# EAGLE board ATTiny Fuse Reset with 12V Charge Pump (EAGLE 6.0)
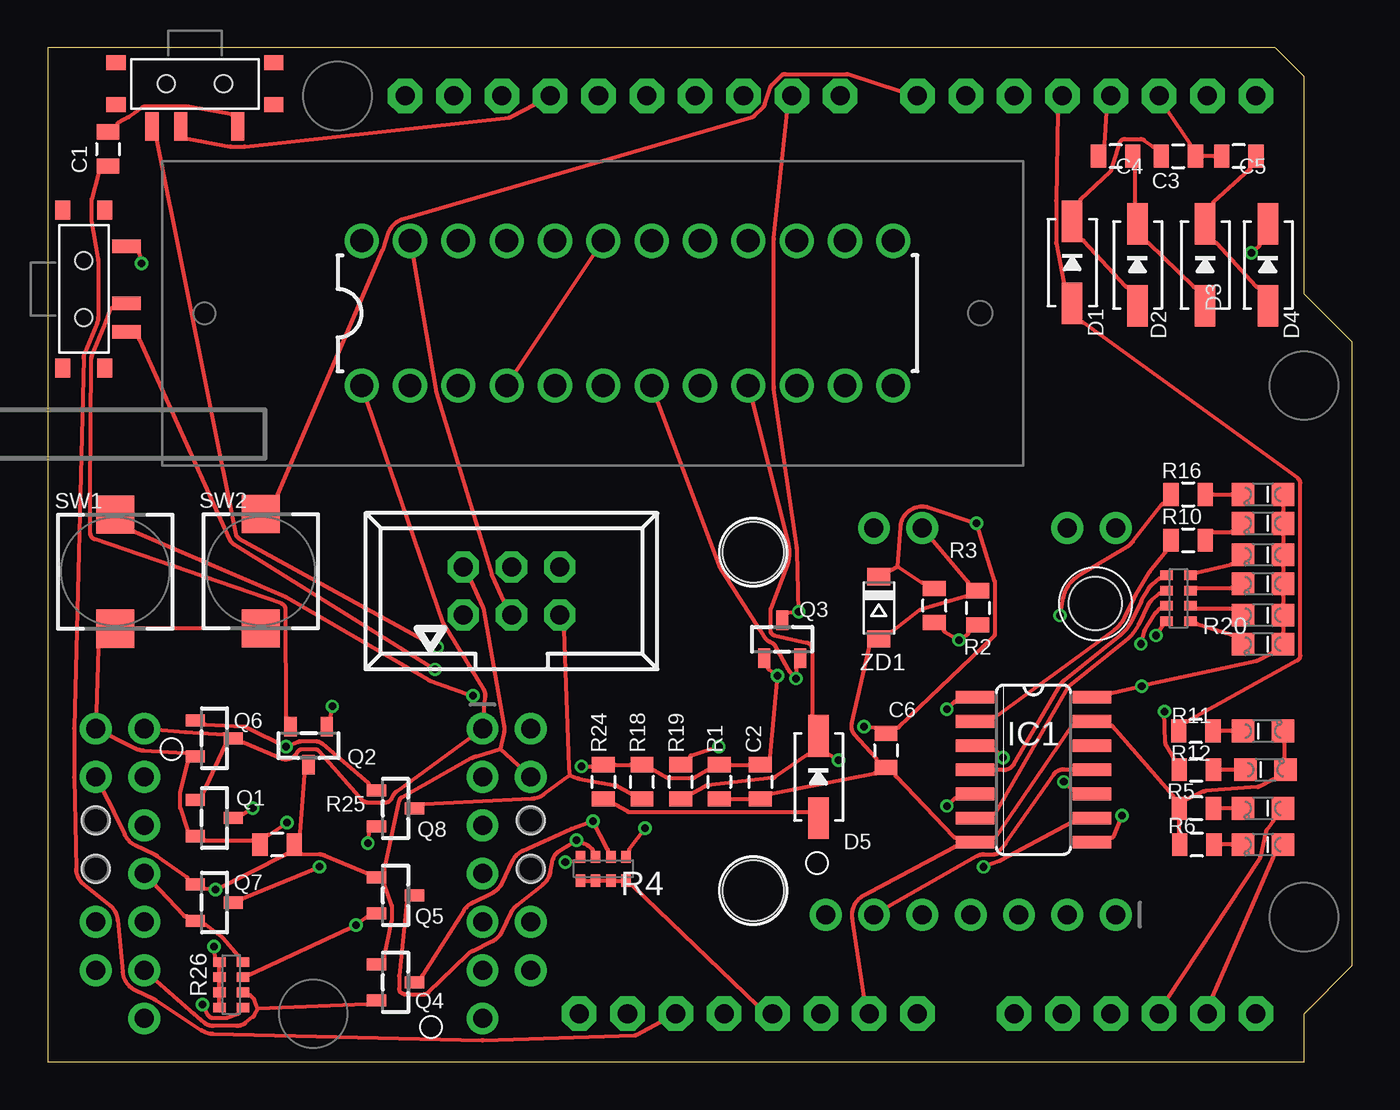
[diagram p0: board, top side]
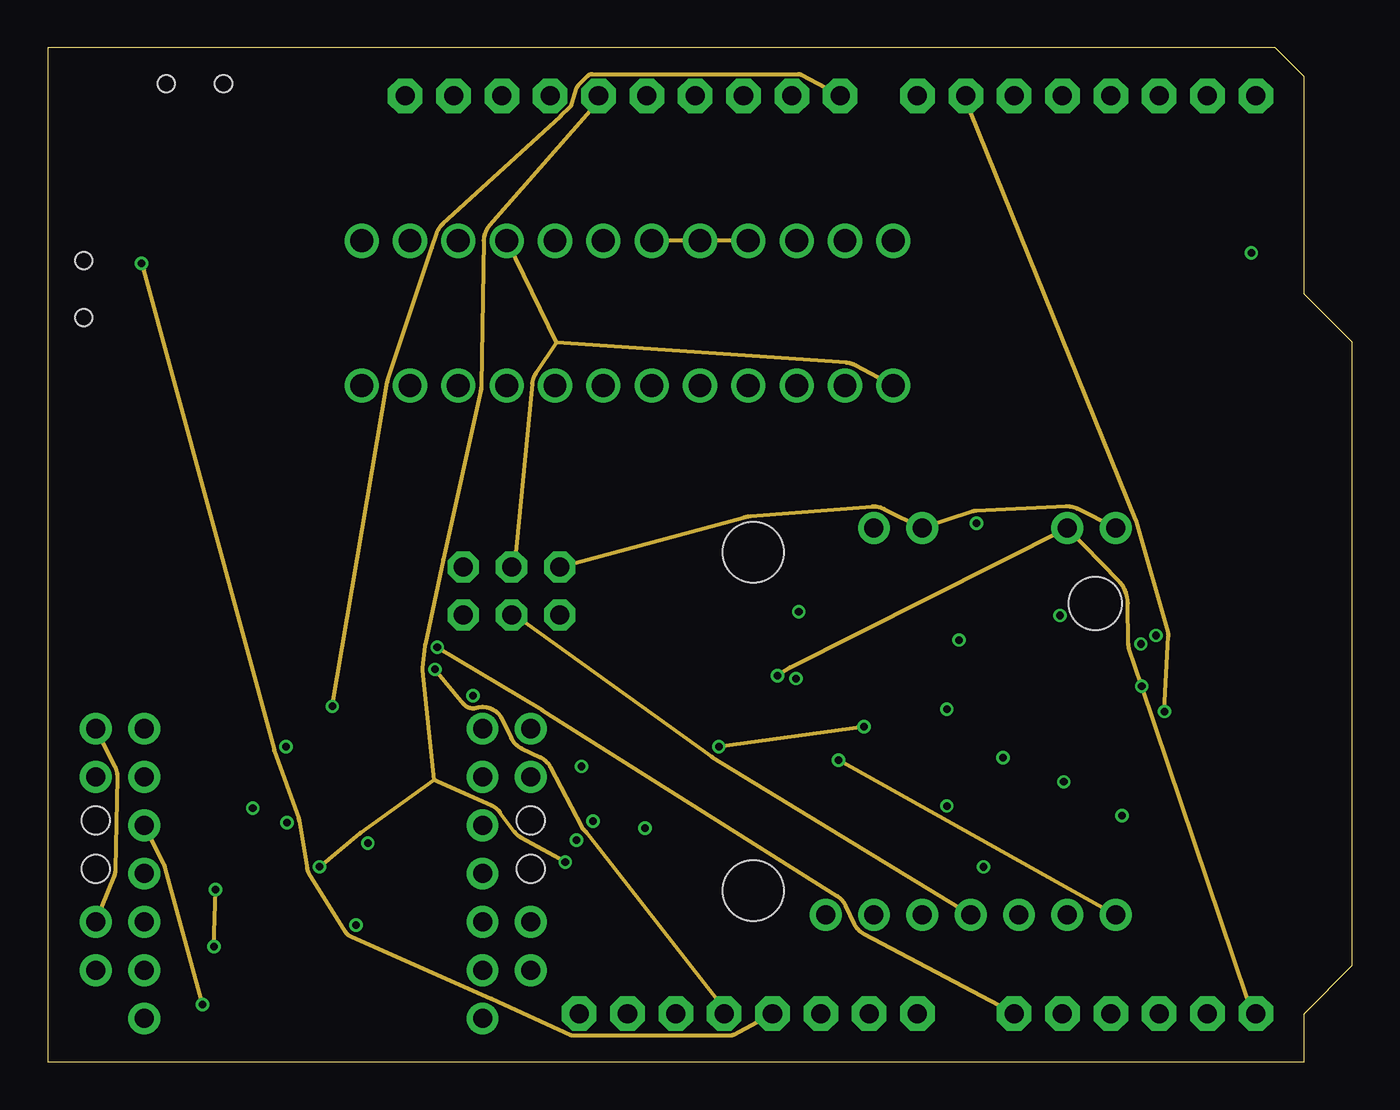
[diagram p1: board, inner layer top-1]
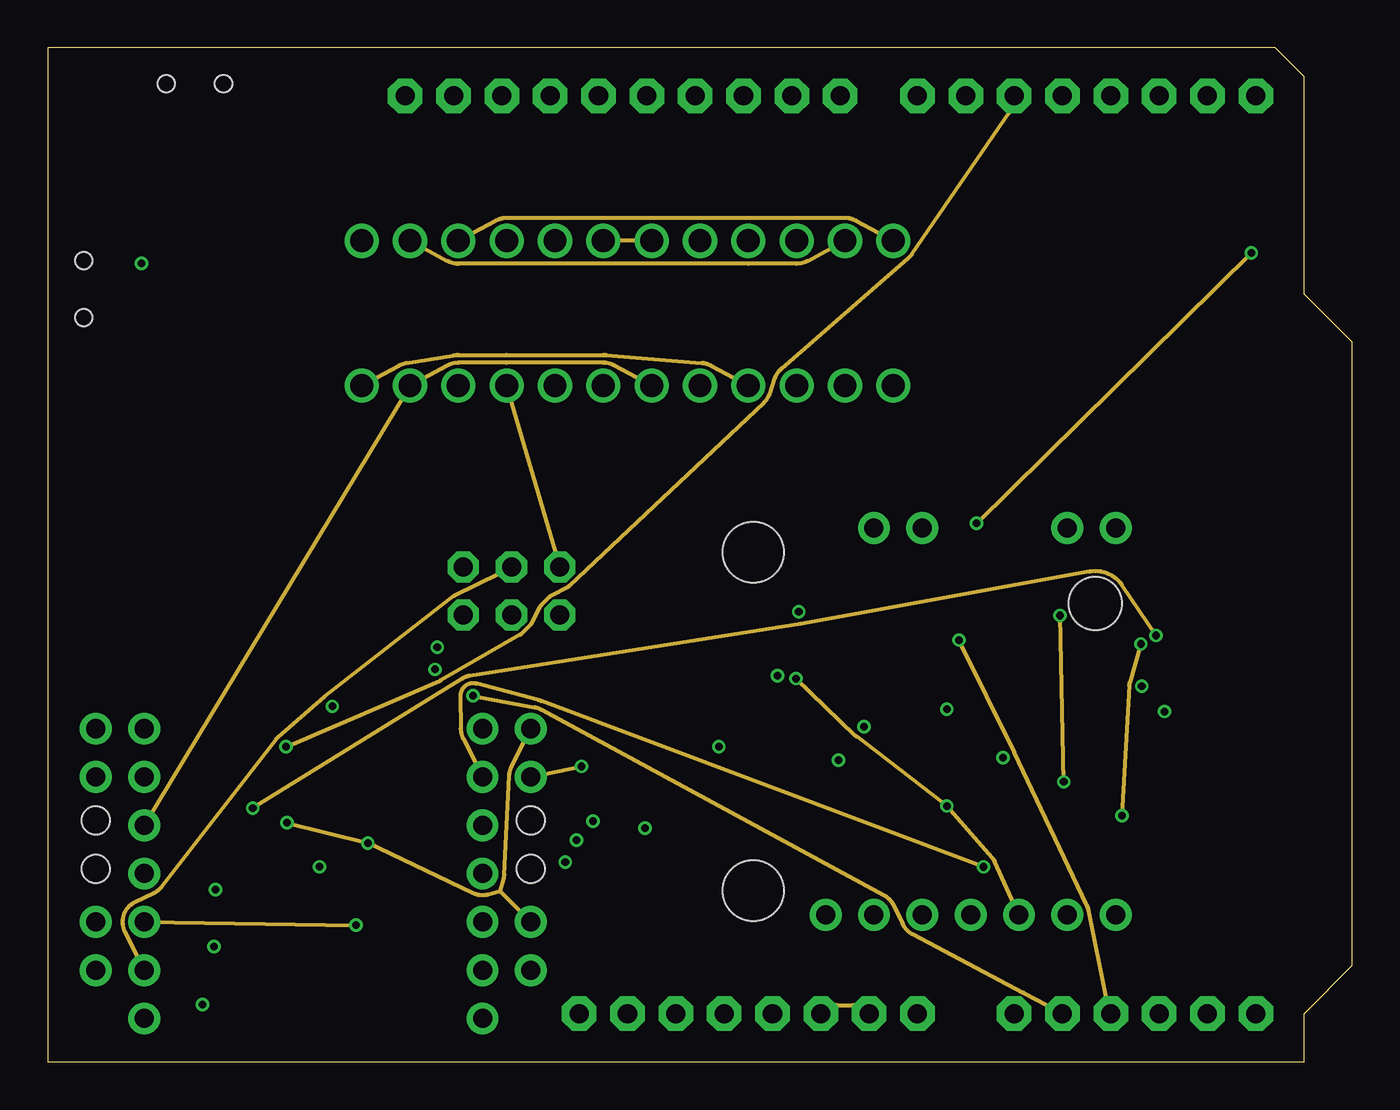
[diagram p2: board, inner layer bot-1]
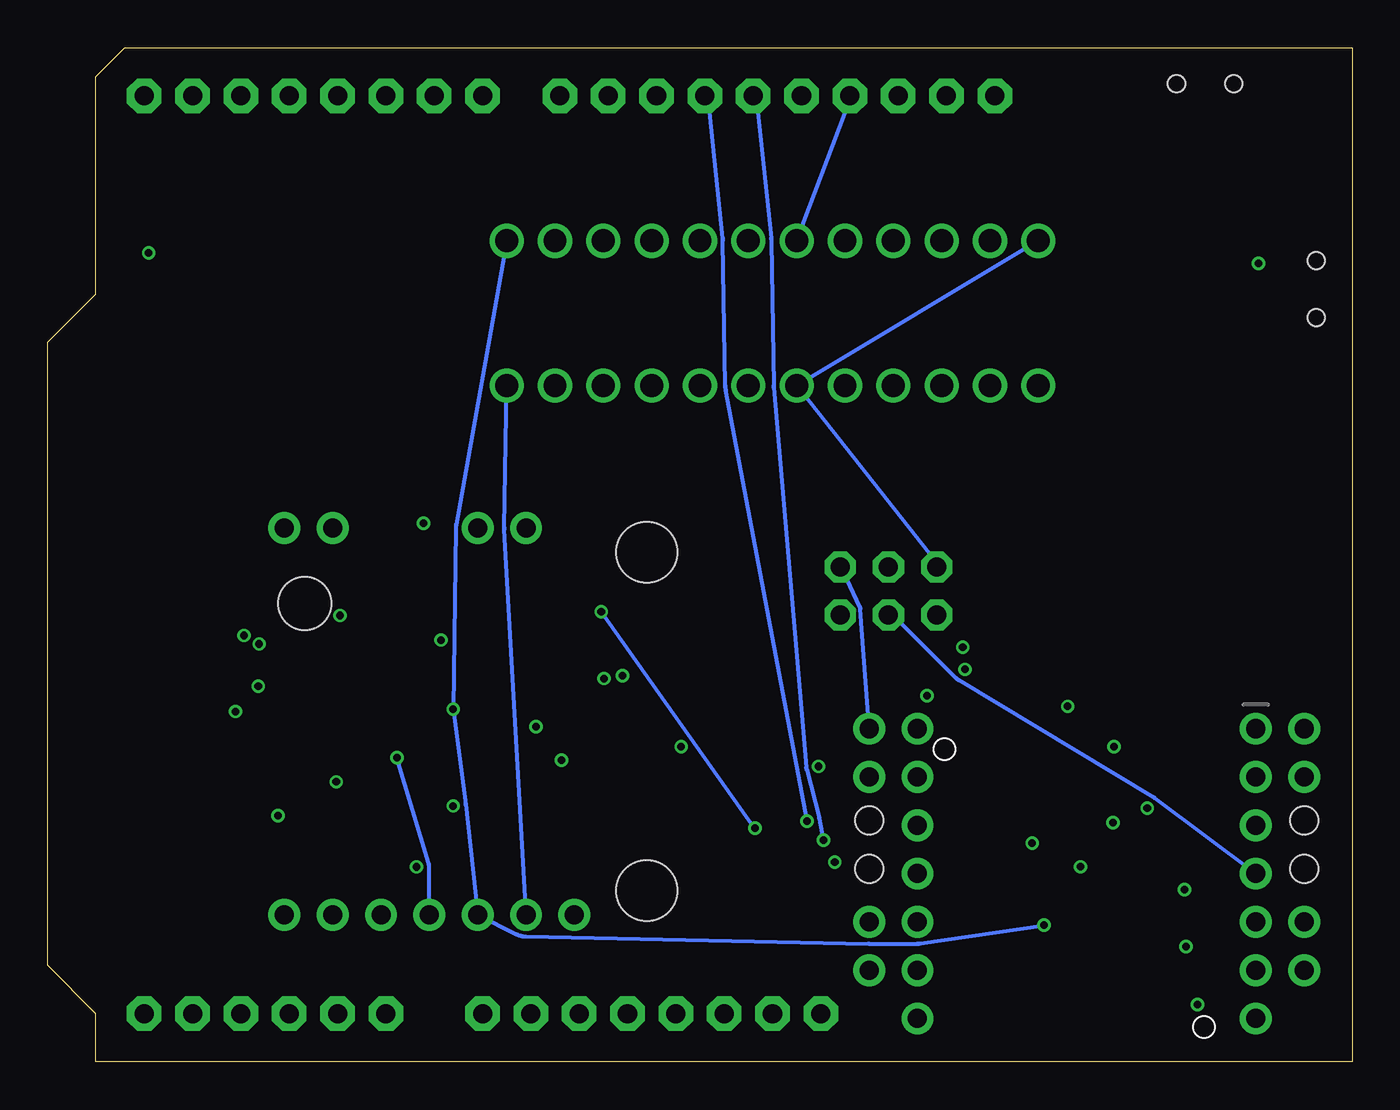
[diagram p3: board, bottom side, seen from below]

Size 68.58 x 53.34 mm. Coordinates in mm from the lower left corner, seen from the top.
Outline: 0,53.34 0,0 66.04,0 66.04,2.54 68.58,5.08 68.58,37.85 66.04,40.39 66.04,51.82 64.52,53.34 0,53.34
Copper layers 1+2+3+16: TOP 0.035mm / dielectric 0.15mm / top-1 0.0035mm / dielectric 0.2mm / bot-1 0.0035mm / dielectric 0.15mm / BOTTOM 0.035mm
Design rules: minimum track width 0.2032mm, track to track 0.2032mm, copper to edge 0.254mm, minimum pad ring 0.1mm, minimum via ring 0.1mm
Net classes: 0 default: width 0.203 mm, clearance 0.205 mm

## Footprints (pad centres in the part's own frame; a part is rotated, then mirrored left to right if it is on the bottom)
BREAKOUT_TAMI_NOHOLES = drill 1 pad 1.676: 1.PB5 -10.16,-8.89; 2.PB4 -10.16,-6.35; 3.PB3 -10.16,-3.81; 4.PB2 -10.16,-1.27; 5.PB1 -10.16,1.27; 6.PB0 -10.16,3.81; 7.GND -10.16,6.35; 8.GND 10.16,-8.89; 9.VCC 10.16,-6.35; 10.GND 10.16,1.27; 11.BAT 10.16,3.81
BREAKOUT_ATTAMI = drill 1 pad 1.676: 1.PB5 1.27,1.27; 2.PB4 1.27,3.81; 3.PB3 1.27,6.35; 4.PB2 1.27,8.89; 5.PB1 1.27,11.43; 6.PB0 1.27,13.97; 7.GND 1.27,16.51; 8.GND 21.59,1.27; 9.VCC 21.59,3.81; 10.GND 21.59,11.43; 11.BAT 21.59,13.97 | hole 2.8: 17.628,2.337 | hole 3.2: 20.32,20.32; 2.54,20.32
0805 = smd 0.8 x 1.2: 1 -0.9,0; 2 0.9,0
SOD-323 = smd 2.184 x 1.067: AQ 2.159,0; CQ -2.159,0
LED-805 = smd 1.2 x 1.2: A 0,-1.05; C 0,1.05
SO14 = smd 0.66 x 2.032: 1 -3.81,-3.073; 2 -2.54,-3.073; 3 -1.27,-3.073; 4 0,-3.073; 5 1.27,-3.073; 6 2.54,-3.073; 7 3.81,-3.073; 8 3.81,3.073; 9 2.54,3.073; 10 1.27,3.073; 11 0,3.073; 12 -1.27,3.073; 13 -2.54,3.073; 14 -3.81,3.073
1X02_PP_HOLES_ONLY = drill 0.889 pad 1.397: 1 0,0; 2 2.54,0 | hole 1.473: 2.54,0; 0,0
SOT23-R = smd 0.635 x 1.016: 1 -0.95,-1; 2 0.95,-1; 3 0,1
0603-ARV = smd 0.5 x 0.65: 1 -1.2,-0.625; 2 -0.4,-0.625; 3 0.4,-0.625; 4 1.2,-0.625; 5 1.2,0.625; 6 0.4,0.625; 7 -0.4,0.625; 8 -1.2,0.625
PUSHBUTTON_SMD_SJ = smd 2 x 2: P$1 3,0; P$2 -3,0
KPS-1290 = smd 0.7 x 1.5: O -2.25,2.25; P 0.75,2.25; S 2.25,2.25 | smd 1 x 0.8: P$1 -4.15,1.1; P$2 -4.15,-1.1; P$3 4.15,-1.1; P$4 4.15,1.1 | hole 0.9: 1.5,0; -1.5,0
ARDUINOR3-BPLACE = drill 1 pad 1.815 octagon: 3V 35.56,2.54; 5V 38.1,2.54; A0 50.8,2.54; A1 53.34,2.54; A2 55.88,2.54; A3 58.42,2.54; A4 60.96,2.54; A5 63.5,2.54; AREF 23.876,50.8; D0 63.5,50.8; D1 60.96,50.8; D2 58.42,50.8; D3 55.88,50.8; D4 53.34,50.8; D5 50.8,50.8; D6 48.26,50.8; D7 45.72,50.8; D8 41.656,50.8; D9 39.116,50.8; D10 36.576,50.8; D11 34.036,50.8; D12 31.496,50.8; D13 28.956,50.8; GND 26.416,50.8; GND1 43.18,2.54; GND2 40.64,2.54; IOREF 30.48,2.54; RESERVED 27.94,2.54; RESET 33.02,2.54; SCL 18.796,50.8; SDA 21.336,50.8; VIN 45.72,2.54
DIL-24-ZIF = drill 1.2 pad 1.8: P$1 -13.97,-3.81; P$2 -11.43,-3.81; P$3 -8.89,-3.81; P$4 -6.35,-3.81; P$5 -3.81,-3.81; P$6 -1.27,-3.81; P$7 1.27,-3.81; P$8 3.81,-3.81; P$9 6.35,-3.81; P$10 8.89,-3.81; P$11 11.43,-3.81; P$12 13.97,-3.81; P$13 13.97,3.81; P$14 11.43,3.81; P$15 8.89,3.81; P$16 6.35,3.81; P$17 3.81,3.81; P$18 1.27,3.81; P$19 -1.27,3.81; P$20 -3.81,3.81; P$21 -6.35,3.81; P$22 -8.89,3.81; P$23 -11.43,3.81; P$24 -13.97,3.81
057-006-1 = drill 1 pad 1.632 octagon: 1 -2.54,-1.27; 2 -2.54,1.27; 3 0,-1.27; 4 0,1.27; 5 2.54,-1.27; 6 2.54,1.27
SOD-123 = smd 0.91 x 1.22: A 1.635,0; C -1.635,0

## Placement (x,y rotation side)
A1  [BREAKOUT_TAMI_NOHOLES]  12.7,8.64 180 top
A2  [BREAKOUT_ATTAMI]  57.4,6.48 90 top
A3  [BREAKOUT_TAMI_NOHOLES]  15.24,8.64 180 bottom
C1  [0805]  3.17,48.01 270 top
C2  [0805]  37.47,14.73 270 top
C3  [0805]  59.44,47.62 0 top
C4  [0805]  56.13,47.62 180 top
C5  [0805]  62.61,47.62 180 top
C6  [0805]  44.07,16.38 270 top
D1  [SOD-323]  53.85,42.04 270 top
D2  [SOD-323]  57.28,41.91 270 top
D3  [SOD-323]  60.83,41.91 270 top
D4  1N4148  [SOD-323]  64.14,41.91 270 top
D5  [SOD-323]  40.51,14.99 270 top
HBEAT  H.B.  [LED-805]  64.01,15.37 270 top
HV_O  HV  [LED-805]  63.88,17.4 270 top
IC1  [SO14]  51.82,15.37 270 top
ISP  PMD  [LED-805]  63.88,13.34 90 top
ISP_ERR  ERR  [LED-805]  63.88,11.43 90 top
JP1  [1X02_PP_HOLES_ONLY]  25.4,10.16 90 top
JP2  [1X02_PP_HOLES_ONLY]  2.54,10.16 90 top
PB0  PB0  [LED-805]  63.88,29.84 90 top
PB1  PB1  [LED-805]  63.88,28.32 90 top
PB2  PB2  [LED-805]  63.88,26.67 90 top
PB3  PB3  [LED-805]  63.88,25.15 90 top
PB4  PB4  [LED-805]  63.88,23.5 90 top
PB5  PB5  [LED-805]  63.88,21.97 90 top
Q1  [SOT23-R]  8.76,12.83 270 top
Q2  [SOT23-R]  13.72,16.64 180 top
Q3  [SOT23-R]  38.61,22.23 0 top
Q4  [SOT23-R]  18.29,4.19 270 top
Q5  [SOT23-R]  18.29,8.76 270 top
Q6  [SOT23-R]  8.76,17.02 270 top
Q7  [SOT23-R]  8.76,8.38 270 top
Q8  [SOT23-R]  18.29,13.34 270 top
R1  [0805]  35.31,14.73 270 top
R2  [0805]  48.9,23.88 270 top
R3  [0805]  46.61,24 90 top
R4  [0603-ARV]  29.21,10.16 180 top
R5  [0805]  60.38,13.34 180 top
R6  [0805]  60.4,11.43 180 top
R10  [0805]  59.94,27.43 0 top
R11  [0805]  60.35,17.4 180 top
R12  [0805]  60.38,15.37 0 top
R16  [0805]  59.94,29.84 0 top
R18  [0805]  31.24,14.73 90 top
R19  [0805]  33.27,14.73 90 top
R20  [0603-ARV]  59.44,24.38 90 top
R24  [0805]  29.21,14.73 270 top
R25  [0805]  12.06,11.43 180 top
R26  [0603-ARV]  9.65,4.06 90 top
SW1  [PUSHBUTTON_SMD_SJ]  3.56,25.78 270 top
SW2  [PUSHBUTTON_SMD_SJ]  11.2,25.81 270 top
SW3  [KPS-1290]  7.75,51.44 180 top
SW4  SWITCH_SPDT  [KPS-1290]  1.91,40.64 270 top
U1  [ARDUINOR3-BPLACE]  0,0 0 top
U$2  [DIL-24-ZIF]  30.48,39.37 0 top
X1  [057-006-1]  24.38,24.77 0 top
ZD1  [SOD-123]  43.69,23.88 270 top

## Library data of the parts
A1-A3 C1-C6 D1-D5 HBEAT HV_O ISP ISP_ERR PB0 PB1-PB5 R1-R3 R5 R6 R10-R12 R16 R18 R19 R24 R25 U1 = ATtami
IC1 = 74xx-eu
JP1 JP2 = SparkFun-Connectors
Q1-Q8 SW1 SW2 = microbuilder
R4 R20 R26 = SparkFun-Passives
SW3 SW4 = SparkFun-Electromechanical
U$2 = ATTiny Fuse Reset with 12V Charge Pump
X1 = con-panduit; OC_FARNELL: unknown; OC_NEWARK: unknown
ZD1 = dp_devices

## Nets
11.5V: C6.1 D4.CQ R3.2 R19.2 ZD1.C
ATTINY_VCC: A1.9.VCC A2.9.VCC A3.9.VCC C2.1 IC1.14 PB0.A PB1.A PB2.A PB3.A PB4.A PB5.A Q2.3 Q3.1 Q4.1 Q5.1 Q7.1 R1.1 R18.2 R24.1 R25.1 R26.5 R26.6 R26.7 R26.8 U1.A5 U$2.P$6 U$2.P$24 X1.2
GND: A1.8.GND A1.10.GND A2.8.GND A2.10.GND A3.8.GND A3.10.GND C2.2 C6.2 HBEAT.C HV_O.C IC1.7 IC1.13 Q1.2 Q6.2 Q8.2 R1.2 R2.1 R5.2 R6.2 R25.2 SW1.P$1 SW2.P$1 SW3.P U1.GND U1.GND1 U1.GND2 U$2.P$4 U$2.P$16 U$2.P$17 U$2.P$18 U$2.P$19 X1.6 ZD1.A
HV/RESET: A1.1.PB5 A2.1.PB5 A3.1.PB5 D5.CQ Q1.1 Q6.3 R19.1 U$2.P$1 U$2.P$9
HV_OFF(RESET): Q6.1 Q8.1 U1.D5
HV_SENSE: R2.2 R3.1 U1.A2
ISP_RESET: Q8.3 R18.1 X1.5
N$1: Q2.2 SW4.P
N$2: Q3.3 R4.1 U1.D9
N$3: SW3.S U1.A0
N$4: HV_O.A R11.1
N$5: D5.AQ R24.2
N$6: ISP.C R5.1
N$7: A1.2.PB4 IC1.9
N$8: Q4.3 R4.2 U1.D11
N$9: SW1.P$2 U1.A1
N$10: C3.1 D1.CQ D2.AQ
N$11: C4.1 D2.CQ D3.AQ
N$12: C5.1 D3.CQ D4.AQ
N$13: IC1.10 R16.1
N$14: C1.1 SW3.O
N$15: ISP_ERR.C R6.1
N$16: SW4.S U1.3V
N$17: ISP_ERR.A U1.A4
N$18: ISP.A U1.A3
N$19: R12.1 U1.D6
N$20: HBEAT.A R12.2
N$21: IC1.2 R10.1
N$22: SW2.P$2 U1.D7
N$23: PB2.C R20.4
N$24: IC1.4 R20.5
N$25: PB1.C R10.2
N$26: IC1.6 R20.6
N$27: PB0.C R16.2
N$28: IC1.8 R20.7
N$29: PB3.C R20.3
N$30: PB4.C R20.2
N$31: PB5.C R20.1
N$32: Q1.3 R20.8
N$33: C1.2 U1.RESET
N$34: Q7.3 R4.4 U1.D13
N$36: X1.1
N$37: Q5.3 R4.3 U1.D12
P1: C3.2 C5.2 U1.D2
P2: C4.2 U1.D3
PUMP_VCC: D1.AQ R11.2 U1.D4
SCI: A2.3.PB3 A3.3.PB3 IC1.5 Q3.2 R26.1 U$2.P$2 U$2.P$7
SDI_MOSI: A2.6.PB0 A3.6.PB0 IC1.11 Q4.2 R26.2 U$2.P$12 U$2.P$21 X1.4
SDO-SCK: A2.4.PB2 A3.4.PB2 IC1.3 Q7.2 R26.4 U$2.P$14 U$2.P$23 X1.3
SII-MISO: A2.5.PB1 A3.5.PB1 IC1.1 Q5.2 R26.3 U$2.P$13 U$2.P$22
VCC: R4.5 R4.6 R4.7 R4.8 SW4.O U1.5V
VCC_OFF: Q2.1 U1.D8
VIN: U1.VIN

## Tracks (layer width: path | path; a pad name or v marks a point on that pad's centre or on a via)
11.5V  (via drill 0.4 pad 0.7)
  TOP 0.203: R19.2 33.77,15.93 33.77,16.03 arc-72 33.84,16.13 v35.28,16.59 | ZD1.C 44.2,25.86 44.3,25.86 arc28 44.34,25.88 44.69,26.06 | 44.69,26.06 44.83,28.14 arc-105 46.34,29.15 v48.83,28.32 49.79,25.27 arc-17 49.8,25.18 49.8,22.58 arc-46 49.71,22.35 44.74,17.61 arc-44 44.67,17.58 44.57,17.58 C6.1 43.57,17.58 43.47,17.58 43.46,17.58 v42.92,17.63 | 44.69,26.06 45.95,25.22 arc34 46.01,25.2 46.11,25.2 R3.2 | D4.CQ 63.7,43.08 63.7,42.98 arc-48 63.67,42.9 v63.27,42.53
  top-1 0.203: v35.28,16.59 v42.92,17.63
  bot-1 0.203: v63.27,42.53 v48.83,28.32
ATTINY_VCC  (via drill 0.4 pad 0.7)
  TOP 0.203: PB0.A 64.93,29.35 64.93,29.25 64.93,28.92 64.93,28.82 PB1.A 64.93,27.82 64.93,27.72 64.93,27.27 64.93,27.17 PB2.A 64.93,26.17 64.93,26.07 64.93,25.75 64.93,25.64 PB3.A 64.93,24.65 64.93,24.55 64.93,24.09 64.93,23.99 PB4.A 64.93,23 64.93,22.89 64.93,22.57 64.93,22.47 PB5.A 64.43,21.47 64.33,21.47 arc27 64.28,21.46 63.57,21.1 arc-15 63.5,21.07 v57.51,19.76 55.93,19.41 arc-13 55.91,19.41 55.8,19.41 IC1.14 | R25.1 12.67,10.93 12.56,10.93 arc27 12.52,10.92 v8.83,9.06 8.28,9.12 arc6 8.27,9.12 8.17,9.12 Q7.1 7.36,9.55 7.36,9.65 arc55 7.31,9.73 5.74,10.84 arc10 5.58,10.94 4.58,11.41 arc-39 4.04,11.96 3.48,13.15 arc2 3.47,13.18 A1.9.VCC | Q2.3 13.5,15.23 13.5,15.13 13.5,15.12 13.26,12.04 13.26,12.03 13.26,11.93 R25.1 | Q3.1 37.87,20.82 37.87,20.72 arc54 37.92,20.63 v38.36,20.32 37.96,16.03 37.96,15.93 C2.1 36.97,15.63 36.87,15.63 35.91,15.63 35.8,15.63 R1.1 34.81,15.33 34.71,15.33 arc29 34.66,15.32 34.02,14.96 arc-29 33.87,14.93 32.67,14.93 arc-29 32.52,14.96 31.89,15.32 arc29 31.84,15.33 31.74,15.33 R18.2 30.74,15.63 30.64,15.63 29.81,15.63 29.71,15.63 R24.1 28.71,15.54 28.61,15.54 v28.05,15.54 | R25.1 13.26,10.93 13.37,10.93 14.3,10.92 arc-22 14.55,10.87 16.74,9.94 arc23 16.78,9.93 16.88,9.93 Q5.1 | A3.9.VCC 23.8,16.47 | R26.8 9.03,3.01 9.03,3.11 9.03,3.41 9.03,3.52 R26.7 9.03,3.81 9.03,3.91 9.03,4.21 9.03,4.32 R26.6 9.03,4.61 9.03,4.71 9.03,5.01 9.03,5.12 R26.5 8.8,5.41 8.8,5.51 arc6 8.8,5.53 v8.74,6.07 | Q5.1 17.69,9.93 17.69,10.03 arc-12 17.7,10.05 18.48,13.72 arc-49 18.63,13.92 22.3,15.98 arc-12 22.52,16.08 23.8,16.47
  TOP 0.203: X1.2 22.16,25.43 22.23,25.35 22.23,25.35 arc-19 22.25,25.32 22.88,23.93 arc-14 22.9,23.86 23.99,17.73 arc-23 23.98,17.27 23.8,16.47 | Q4.1 17.69,5.36 17.69,5.46 arc-12 17.7,5.48 18.1,7.43 arc12 18.1,7.5 18.1,8.13 arc19 18.09,8.23 17.7,9.36 arc-19 17.69,9.4 17.69,9.5 Q5.1
  top-1 0.203: v8.74,6.07 v8.83,9.06 | v38.36,20.32 38.97,20.71 arc-6 39.03,20.75 A2.9.VCC 56.29,25.29 arc-43 56.77,24.13 56.8,21.97 arc18 56.84,21.77 v57.51,19.76 63.06,3.35 arc26 63.08,3.31 63.15,3.23 U1.A5
  bot-1 0.203: A3.9.VCC v28.05,15.54
  BOTTOM 0.203: X1.2 22.16,26.64 22.23,26.72 22.23,26.72 arc6 22.24,26.73 U$2.P$6 U$2.P$24
GND  (via drill 0.4 pad 0.7)
  TOP 0.203: Q8.2 16.88,12.17 16.88,12.07 16.88,12.06 v16.83,11.52 | R6.2 59.49,11.93 59.49,12.03 59.49,12.73 59.49,12.84 R5.2 | v12.58,12.59 11.62,11.95 arc-34 11.56,11.93 11.46,11.93 R25.2 10.87,11.66 10.77,11.66 8.27,11.66 8.17,11.66 Q1.2 7.36,12.09 7.36,12.19 arc19 7.35,12.23 6.96,13.36 arc-19 6.95,13.46 6.95,14.1 arc-14 6.96,14.17 7.35,15.72 arc14 7.36,15.75 7.36,15.85 Q6.2 7.36,16.24 7.25,16.24 5.01,16.38 arc-23 4.56,16.5 A1.8.GND 2.66,21.78 2.66,21.88 SW1.P$1 4.45,22.79 4.56,22.79 10.2,22.79 10.3,22.79 SW2.P$1 | U$2.P$4 U$2.P$19 | A2.10.GND 48.37,25.24 arc-40 48.4,25.18 48.4,25.07 R2.1 48.4,24.48 48.3,24.48 arc16 48.27,24.47 45.92,23.8 arc22 45.82,23.75 44.36,22.62 arc-38 44.3,22.59 44.2,22.59 ZD1.A 43.18,21.89 43.18,21.79 arc-13 43.18,21.76 42.27,17.78 arc55 42.43,17.19 43.54,15.95 arc-42 43.57,15.88 43.57,15.78 C6.2 | HV_O.C 65,16.9 65,16.8 65,15.97 65,15.87 HBEAT.C 64.56,14.87 64.46,14.87 arc27 64.41,14.86 63.7,14.49 arc-22 63.58,14.46 60.85,14.24 arc20 60.75,14.21 59.92,13.84 arc-24 59.88,13.83 59.77,13.83 R5.2 | R1.2 35.8,13.83 35.91,13.83 36.87,13.83 36.97,13.83 C2.2 37.96,14.13 38.06,14.13 arc11 38.08,14.13 43.45,15.18 arc-11 43.47,15.19 43.57,15.19 C6.2 | U1.GND1 42.93,3.28 42.93,3.38 arc9 42.93,3.39 42.3,7.58 arc-70 42.89,8.76 47.68,11.32 arc-28 47.73,11.33 47.83,11.33 IC1.7 | R5.2 59.18,13.83 59.18,13.94 arc41 59.15,14 55.98,17.64 arc49 55.91,17.68 55.8,17.68 IC1.13 53.98,17.68 53.87,17.68 arc56 53.79,17.63 49.84,11.83 arc-56 49.76,11.79 49.66,11.79 IC1.7 | SW3.P 7.25,48.54 7.35,48.54 arc-10 7.37,48.53 9.59,48.13 arc10 9.65,48.13 10.35,48.13 arc6 10.38,48.13 24.26,49.66 arc22 24.37,49.69 25.63,50.36 arc17 25.65,50.38 25.72,50.45 U1.GND
  TOP 0.203: IC1.7 47.83,11.79 47.73,11.79 arc-46 47.65,11.82 44.6,15.01 arc-44 44.57,15.08 44.57,15.19 C6.2
  top-1 0.203: A1.10.GND 3.51,9.77 arc21 3.58,10.14 3.69,14.96 arc28 3.56,15.5 A1.8.GND | U$2.P$16 U$2.P$17 U$2.P$18 | X1.6 27.58,26.25 27.68,26.25 arc15 27.7,26.25 36.59,28.64 arc-10 36.93,28.7 43.34,29.21 arc-31 43.95,29.09 A2.10.GND 48.62,28.95 arc-16 48.79,28.98 53.54,29.21 arc-30 54.11,29.09 A2.8.GND
  bot-1 0.203: X1.6 26.71,26.69 26.71,26.79 arc16 26.71,26.82 U$2.P$4 | U$2.P$18 U$2.P$19 | U1.GND2 41.33,2.89 41.41,2.96 arc-45 41.48,2.99 42.34,2.99 arc-45 42.41,2.96 42.49,2.89 U1.GND1 | A3.10.GND 23.79,8.97 | 23.79,8.97 23.16,8.8 arc-40 22.37,8.87 v16.83,11.52 v12.58,12.59 | 23.79,8.97 23.96,9.61 arc12 24,9.85 24.26,15.04 arc-24 24.38,15.5 A3.8.GND
  BOTTOM 0.203: U$2.P$19 26.67,49.93 arc-21 26.66,49.96 26.66,50.06 U1.GND | A3.8.GND 25.86,23.83 arc-20 25.89,23.93 26.54,25.35 26.61,25.43 X1.6
HV/RESET  (via drill 0.4 pad 0.7)
  TOP 0.203: D5.CQ 40.08,16.15 39.98,16.15 arc35 39.92,16.14 38.24,14.98 arc-28 38.1,14.93 34.67,14.54 arc23 34.55,14.5 33.92,14.14 arc-29 33.87,14.13 33.77,14.13 R19.1 | v41.57,15.87 41.1,16.14 arc30 41.05,16.15 40.95,16.15 D5.CQ | U$2.P$9 38.93,27.27 arc-35 38.87,26.12 38,23.84 arc21 37.98,23.73 37.98,22.72 arc77 38.22,22.42 39.94,22.03 arc-77 40.18,21.73 40.18,18.24 40.18,18.14 D5.CQ | Q6.3 10.17,16.8 10.27,16.8 arc-23 10.31,16.79 12.28,15.97 arc86 13.12,16.28 13.12,16.28 arc-63 13.4,16.45 14.03,16.45 arc-48 14.26,16.35 16.55,13.76 arc48 16.78,13.66 17.8,13.66 arc64 18.07,13.83 18.14,13.96 arc-28 18.36,14.23 A1.1.PB5 23.01,19.2 arc37 22.92,19.6 20.83,23.02 arc-12 20.8,23.08 U$2.P$1 | Q1.1 8.17,13.99 8.17,14.1 arc-25 8.18,14.14 9.35,16.66 arc25 9.36,16.7 9.36,16.8 Q6.3 | A3.1.PB5 7.23,17.34 7.24,17.34 9.25,17.23 9.26,17.23 9.36,17.23 Q6.3
  top-1 0.203: A2.1.PB5 v41.57,15.87
  bot-1 0.203: U$2.P$1 18.48,36.62 arc-19 18.86,36.75 21.33,37.15 arc-9 21.59,37.17 24.13,37.18 29.21,37.18 arc-5 29.34,37.17 34.39,36.76 arc-24 34.86,36.62 U$2.P$9
HV_OFF(RESET)  (via drill 0.4 pad 0.7)
  TOP 0.203: Q6.1 8.17,17.75 8.27,17.75 8.28,17.75 10.29,17.64 arc-23 10.41,17.61 v12.54,16.57 13.14,16.81 arc-22 13.4,16.86 14.03,16.86 arc-41 14.5,16.69 16.85,14.68 arc-49 16.88,14.6 16.88,14.5 Q8.1
  bot-1 0.203: v12.54,16.57 20.61,20.04 arc7 20.68,20.07 24.85,22.48 arc15 24.91,22.52 25.36,22.96 arc17 25.41,23.04 25.9,23.95 arc-17 25.95,24.02 26.39,24.47 arc-17 26.47,24.52 27.38,25.01 arc15 27.45,25.06 37.66,34.68 arc28 37.98,35.18 38.23,35.94 arc-31 38.58,36.47 45.24,42.27 arc14 45.45,42.5 50.54,49.9 arc34 50.55,49.96 50.55,50.06 U1.D5
HV_SENSE  (via drill 0.4 pad 0.7)
  TOP 0.203: R2.2 48.4,22.68 48.4,22.58 arc-56 48.35,22.49 v47.9,22.19 47.16,22.61 arc-60 47.11,22.7 47.11,22.8 R3.1
  bot-1 0.203: U1.A2 55.63,3.28 55.63,3.38 arc11 55.63,3.4 54.72,7.97 arc14 54.63,8.24 50.82,16.28 arc1 50.81,16.29 v47.9,22.19
ISP_RESET
  TOP 0.203: 27.45,15.07 27.82,14.93 arc11 27.93,14.89 29.87,14.53 arc-19 29.96,14.5 30.59,14.14 arc29 30.64,14.13 30.74,14.13 R18.1 | X1.5 27.14,22.84 27.14,22.74 27.4,15.52 arc5 27.4,15.46 27.45,15.07 | 27.45,15.07 26.08,14.06 arc-33 25.46,13.84 19.8,13.55 19.69,13.55 Q8.3
N$1
  TOP 0.203: Q2.2 12.55,18.04 12.55,18.14 12.55,18.15 12.51,23.81 arc71 12.3,24.1 2.46,27.49 arc-71 2.25,27.78 2.25,29.78 2.3,36.99 arc-22 2.32,37.11 2.98,38.7 arc2 3,38.73 3.31,39.58 arc-70 3.4,39.64 3.51,39.64 SW4.P
N$2  (via drill 0.4 pad 0.7)
  TOP 0.203: U1.D9 38.87,50.06 38.87,49.96 arc-6 38.87,49.95 38.17,43.31 arc6 38.16,43.18 38.16,35.56 arc8 38.18,35.39 39.37,27.13 arc-7 39.4,26.86 v39.48,23.68 38.94,23.63 38.92,23.63 38.82,23.63 Q3.3 | R4.1 30.56,11.01 30.56,11.11 arc-37 30.58,11.17 v31.41,12.29
  BOTTOM 0.203: v31.41,12.29 v39.48,23.68
N$3  (via drill 0.4 pad 0.7)
  TOP 0.203: SW3.S 5.75,48.54 5.75,48.44 arc11 5.75,48.41 9.9,27.75 arc50 10.05,27.54 v20.48,21.8
  top-1 0.203: v20.48,21.8 25.99,18.51 arc-1 26.01,18.49 41.5,8.71 arc-32 41.92,8.24 42.4,7.25 arc36 42.9,6.73 50.01,2.98 arc-17 50.03,2.96 50.1,2.89 U1.A0
N$4
  TOP 0.203: HV_O.A 62.33,17.4 62.23,17.4 61.65,17.4 61.55,17.4 R11.1
N$5
  TOP 0.203: D5.AQ 40.08,13.12 39.98,13.12 30.64,13.12 arc-29 30.49,13.16 29.86,13.52 arc29 29.81,13.53 29.71,13.53 R24.2
N$6
  TOP 0.203: ISP.C 62.33,13.34 62.23,13.34 61.68,13.34 61.57,13.34 R5.1
N$7  (via drill 0.4 pad 0.7)
  TOP 0.203: IC1.9 53.98,12.6 53.87,12.6 arc28 53.83,12.59 50.1,10.6 arc-8 50,10.55 v49.19,10.26
  bot-1 0.203: v49.19,10.26 25.95,18.98 arc6 25.8,19.03 22.52,19.89 arc105 21.7,19.25 21.71,17.52 arc26 21.84,17.01 A1.2.PB4
N$8  (via drill 0.4 pad 0.7)
  TOP 0.203: R4.2 29.46,11.01 29.46,11.11 arc28 29.45,11.16 v28.66,12.67 27.58,12.28 arc5 27.53,12.26 24.97,11.11 arc40 24.46,10.61 23.89,9.41 arc-39 23.36,8.88 22.36,8.4 arc32 21.9,7.98 19.71,4.56 arc33 19.69,4.51 19.69,4.41 Q4.3
  BOTTOM 0.203: v28.66,12.67 32.94,35.34 arc10 32.96,35.54 33.08,43.2 arc-5 33.09,43.31 33.79,49.95 arc6 33.79,49.96 33.79,50.06 U1.D11
N$9  (via drill 0.4 pad 0.7)
  TOP 0.203: SW1.P$2 4.45,27.88 4.56,27.88 arc-23 4.6,27.87 12.49,24.46 arc-7 12.56,24.43 20.02,20.08 arc11 20.14,20.02 v22.36,19.26
  bot-1 0.203: v22.36,19.26 25.61,18.65 arc-18 25.95,18.53 43.98,8.75 arc-36 44.47,8.24 44.94,7.25 arc37 45.44,6.73 51.29,3.65 52.55,2.98 arc-17 52.57,2.96 52.65,2.89 U1.A1
N$10
  TOP 0.203: D2.AQ 56.84,40.74 56.74,40.74 arc-47 56.67,40.77 54.46,43.17 arc47 54.38,43.2 54.28,43.2 D1.CQ 54.28,45.19 54.28,45.29 arc-47 54.31,45.36 55.84,46.8 arc30 55.93,46.94 56.34,48.31 arc-73 56.63,48.53 57.43,48.53 arc-36 57.61,48.48 58.08,48.14 arc36 58.14,48.12 58.24,48.12 C3.1
N$11
  TOP 0.203: C4.1 57.16,47.13 57.16,47.02 57.16,45.16 57.16,45.06 D2.CQ 57.71,43.08 57.81,43.08 arc-44 57.88,43.05 60.23,40.77 arc44 60.3,40.74 60.4,40.74 D3.AQ
N$12
  TOP 0.203: D4.AQ 63.7,40.74 63.6,40.74 arc-47 63.53,40.77 61.44,43.05 arc47 61.37,43.08 61.27,43.08 D3.CQ 61.27,45.06 61.27,45.16 arc-48 61.3,45.24 63.18,46.95 arc48 63.21,47.02 63.21,47.13 C5.1
N$13  (via drill 0.4 pad 0.7)
  TOP 0.203: v53.22,23.48 53.39,24.42 arc-49 54.19,25.57 56.72,27.09 arc21 57.03,27.36 58.56,29.31 arc-52 58.64,29.35 58.75,29.35 R16.1 | IC1.10 53.98,14.33 53.87,14.33 arc-44 53.8,14.35 v53.41,14.73
  bot-1 0.203: v53.41,14.73 v53.22,23.48
N$14
  TOP 0.203: SW3.O 9.75,49.83 9.65,49.83 arc-10 9.63,49.84 7.4,50.24 arc10 7.35,50.24 5.15,50.24 arc36 4.97,50.18 4.28,49.69 arc-8 4.24,49.66 3.73,49.4 arc62 3.67,49.31 3.67,49.2 C1.1
N$15
  TOP 0.203: ISP_ERR.C 62.33,11.43 62.23,11.43 61.7,11.43 61.6,11.43 R6.1
N$16  (via drill 0.4 pad 0.7)
  TOP 0.203: SW4.S 4.8,38.14 4.8,38.04 arc24 4.81,38 9.55,27.51 arc34 9.82,27.2 v20.36,20.64
  top-1 0.203: v20.36,20.64 21.85,18.84 arc67 22.54,18.63 arc-81 23.89,18.02 24.37,17.03 arc39 24.91,16.49 25.89,16.02 arc-37 26.41,15.52 28.08,12.36 arc16 28.19,12.21 28.27,12.12 arc-6 28.32,12.07 35.13,3.32 arc7 35.14,3.31 35.21,3.23 U1.3V
N$17
  TOP 0.203: ISP_ERR.A 64.43,10.93 64.43,10.83 arc-24 64.42,10.79 61.21,3.42 arc24 61.21,3.38 61.21,3.28 U1.A4
N$18
  TOP 0.203: ISP.A 64.43,12.84 64.43,12.73 arc-35 64.41,12.68 64.08,12.21 arc23 64.03,12.1 63.73,10.76 arc-21 63.69,10.66 58.85,3.32 arc-12 58.84,3.31 58.77,3.23 U1.A3
N$19  (via drill 0.4 pad 0.7)
  TOP 0.203: R12.1 59.18,15.87 59.18,15.97 arc31 59.16,16.02 58.79,16.64 arc-30 58.74,16.79 v58.7,18.43
  top-1 0.203: v58.7,18.43 58.91,22.39 arc19 58.89,22.61 57.23,28.38 arc6 57.2,28.5 48.51,49.92 arc-22 48.51,49.96 48.51,50.06 U1.D6
N$20
  TOP 0.203: HBEAT.A 62.46,15.37 62.36,15.37 61.68,15.37 61.57,15.37 R12.2
N$21
  TOP 0.203: IC1.2 49.66,18.14 49.76,18.14 arc36 49.82,18.16 56.07,22.73 arc28 56.6,23.36 57.11,24.4 arc-5 57.17,24.52 57.87,25.7 arc-8 57.93,25.78 58.72,26.77 arc39 58.75,26.83 58.75,26.93 R10.1
N$22
  TOP 0.203: SW2.P$2 12.1,29.7 12.1,29.81 arc-23 12.11,29.85 17.62,42.7 arc5 17.66,42.8 17.9,43.55 arc-56 18.71,44.34 37.01,49.67 arc29 37.14,49.75 37.63,50.24 arc27 37.7,50.36 37.98,51.24 arc-27 38.06,51.36 38.55,51.85 arc-45 38.77,51.95 42,51.95 arc-18 42.1,51.93 44.85,51.05 arc18 44.88,51.05 44.98,51.05 U1.D7
N$23
  TOP 0.203: R20.4 60.28,25.73 60.39,25.73 arc14 60.41,25.73 62.21,26.17 arc-14 62.23,26.17 62.33,26.17 PB2.C
N$24
  TOP 0.203: R20.5 58.59,25.44 58.49,25.44 arc40 58.42,25.41 58.03,25.08 arc19 57.87,24.9 57.52,24.31 arc5 57.47,24.22 56.97,23.18 arc-25 56.39,22.46 53.42,20.06 arc21 53.26,19.87 50.79,15.67 arc-60 50.22,15.35 49.76,15.35 49.66,15.35 IC1.4
N$25
  TOP 0.203: R10.2 61.14,27.88 61.24,27.88 62.23,27.88 62.33,27.88 PB1.C
N$26
  TOP 0.203: R20.6 58.59,24.64 58.49,24.64 arc40 58.42,24.61 58.03,24.28 arc24 57.84,24.05 57.34,23 arc-25 56.65,22.14 53.68,19.75 arc21 53.61,19.66 49.85,13.11 arc-60 49.76,13.06 49.66,13.06 IC1.6
N$27
  TOP 0.203: R16.2 61.14,29.84 61.24,29.84 62.23,29.84 62.33,29.84 PB0.C
N$28  (via drill 0.4 pad 0.7)
  TOP 0.203: v56.46,12.95 56,11.85 arc-67 55.91,11.79 55.8,11.79 IC1.8 | R20.7 58.59,23.84 58.49,23.84 arc47 58.41,23.8 58.26,23.64 arc11 58.23,23.6 57.7,22.78 arc18 57.62,22.59 v57.46,21.98
  bot-1 0.203: v57.46,21.98 56.87,19.94 arc13 56.85,19.8 v56.46,12.95
N$29
  TOP 0.203: R20.3 60.28,24.93 60.39,24.93 62.23,24.93 62.33,24.93 PB3.C
N$30
  TOP 0.203: R20.2 60.28,23.84 60.39,23.84 62.23,23.84 62.33,23.84 PB4.C
N$31
  TOP 0.203: R20.1 60.28,23.04 60.39,23.04 arc-17 60.42,23.03 62.2,22.47 arc17 62.23,22.47 62.33,22.47 PB5.C
N$32  (via drill 0.4 pad 0.7)
  TOP 0.203: v10.79,13.35 10.32,13.06 arc-32 10.27,13.04 10.17,13.04 Q1.3 | R20.8 58.59,23.04 58.59,22.93 arc-35 58.57,22.88 v58.26,22.43
  bot-1 0.203: v58.26,22.43 56.48,25.06 arc66 54.76,25.78 39.59,23.04 arc-1 39.58,23.03 22.19,20.31 arc23 21.8,20.16 v10.79,13.35
N$33
  TOP 0.203: C1.2 2.68,46.81 2.68,46.71 arc-15 2.67,46.68 2.31,45.37 arc15 2.3,45.29 2.3,44.29 arc10 2.3,44.24 2.65,42.27 arc-10 2.66,42.14 2.66,39.14 arc-22 2.6,38.85 1.95,37.26 arc21 1.89,37.01 1.4,17.55 arc1 1.4,17.53 1.4,14.99 arc1 1.4,14.96 1.5,10.14 arc50 1.89,9.34 3.25,8.26 arc-46 3.68,7.47 3.94,4.72 arc59 4.58,3.79 5.58,3.32 arc-8 5.71,3.24 8.08,1.68 arc32 8.67,1.49 22.83,1.14 arc3 22.9,1.14 30.84,1.4 arc26 30.97,1.43 32.23,2.1 arc17 32.25,2.12 32.33,2.19 U1.RESET
N$34  (via drill 0.4 pad 0.7)
  TOP 0.203: Q7.3 10.17,8.6 10.27,8.6 v14.3,10.26 | R4.4 27.86,10.56 27.76,10.56 27.75,10.56 v27.21,10.51
  top-1 0.203: v14.3,10.26 16.41,12.02 arc-4 16.45,12.05 20.3,14.84 | v27.21,10.51 24.9,11.79 arc-24 24.57,12.07 23.77,13.13 arc29 23.33,13.49 20.3,14.84 | U1.D13 28.61,50.1 28.54,50.03 28.53,50.03 23.22,43.98 arc40 22.92,43.2 22.8,35.54 arc-12 22.77,35.3 20.79,26.41 19.84,21.94 arc6 19.83,21.87 19.7,20.71 arc12 19.7,20.58 20.3,14.84
N$37  (via drill 0.4 pad 0.7)
  TOP 0.203: Q5.3 18.88,8.55 18.88,8.45 arc-6 18.88,8.44 18.48,4.54 arc6 18.47,4.51 18.47,3.87 arc90 18.78,3.57 19.8,3.57 arc44 20.01,3.65 22.06,5.65 arc-18 22.36,5.86 23.36,6.34 arc39 23.89,6.87 24.37,7.86 arc-26 24.69,8.26 26.05,9.34 arc40 26.42,9.95 26.56,10.64 arc-46 26.86,11.07 v27.8,11.66 28.39,11.39 arc-18 28.47,11.33 28.63,11.18 arc-47 28.66,11.11 28.66,11.01 R4.3
  BOTTOM 0.203: U1.D12 31.25,50.06 31.25,49.96 arc-6 31.25,49.95 30.55,43.31 arc5 30.54,43.2 30.42,35.54 arc-4 30.41,35.46 28.71,15.48 arc-10 28.69,15.37 28.02,12.83 arc4 28.01,12.79 v27.8,11.66
P1
  TOP 0.203: U1.D2 58.77,50.1 58.84,50.03 arc-11 58.85,50.02 60.02,48.28 arc-34 60.04,48.23 60.04,48.12 C3.2 60.63,47.62 60.74,47.62 61.31,47.62 61.41,47.62 C5.2
P2
  TOP 0.203: U1.D3 55.63,50.06 55.63,49.96 55.53,48.23 55.53,48.12 C4.2
PUMP_VCC
  TOP 0.203: R11.2 59.75,17.9 59.85,17.9 arc29 59.9,17.91 65.68,21.1 arc61 65.84,21.37 65.84,30.45 arc54 65.71,30.69 54.44,38.87 arc36 54.38,38.89 54.28,38.89 D1.AQ 53.42,40.87 53.42,40.97 arc11 53.41,40.99 53.01,43.05 arc-11 53.01,43.1 53.01,45.29 53.09,49.96 53.09,50.06 U1.D4
SCI  (via drill 0.4 pad 0.7)
  TOP 0.203: v47.26,13.46 47.66,13.84 arc-44 47.73,13.87 47.83,13.87 IC1.5 | U$2.P$7 35.3,26.13 arc12 35.48,25.77 37.69,22.33 arc31 37.98,22.07 38.11,22.01 arc-35 38.24,21.88 38.94,20.64 38.94,20.63 38.97,20.57 arc14 39.01,20.51 v39.33,20.16 39.34,20.71 39.34,20.72 39.34,20.82 Q3.2 | R26.1 10.05,2.72 10.05,2.61 arc-70 9.99,2.52 9.46,2.33 arc-20 9.35,2.31 8.7,2.31 arc-62 8.43,2.47 v8.15,3.01
  top-1 0.203: v8.15,3.01 6.18,10.21 arc12 6.1,10.42 A3.3.PB3
  bot-1 0.203: A2.3.PB3 49.78,10.54 arc17 49.68,10.7 v47.26,13.46 42.52,17.11 arc-6 42.46,17.16 v39.33,20.16 | U$2.P$7 29.78,36.62 arc28 29.21,36.77 24.13,36.77 21.59,36.77 arc28 21.02,36.62 U$2.P$2 A3.3.PB3
SDI_MOSI
  TOP 0.203: 11.05,2.81 10.89,3.22 arc22 10.83,3.32 10.68,3.48 arc47 10.6,3.52 10.5,3.52 R26.2 | 11.05,2.81 10.87,2.47 arc-23 10.79,2.38 10.4,2.06 arc-39 9.95,1.9 8.7,1.9 arc-41 8.24,2.07 7.72,2.51 7.71,2.52 A3.6.PB0 | Q4.2 16.88,3.02 16.78,3.02 11.05,2.81 | A2.6.PB0 48.86,10.83 arc-30 49.19,10.92 49.76,10.92 arc52 50,11.04 50.32,11.44 arc3 50.35,11.48 52.87,15.11 arc-55 53.41,15.39 53.87,15.39 53.98,15.39 IC1.11
  top-1 0.203: U$2.P$21 26.74,37.83 | U$2.P$12 42.48,36.62 arc24 41.99,36.76 26.74,37.83 | 26.74,37.83 25.67,36.23 arc28 25.47,35.68 24.59,26.8 arc6 24.59,26.79 24.59,26.69 X1.4
  bot-1 0.203: X1.4 23.77,25.72 23.7,25.65 21.4,24.52 arc12 21.34,24.49 14.56,19.22 arc3 14.53,19.19 12.1,17.07 arc11 12.02,16.98 5.99,9.2 arc-27 5.58,8.87 4.58,8.4 arc91 4.06,6.85 A3.6.PB0
  BOTTOM 0.203: A2.6.PB0 44.58,28 arc4 44.58,28.09 U$2.P$12
SDO-SCK  (via drill 0.4 pad 0.7)
  TOP 0.203: v50.22,16 49.83,16.38 arc44 49.76,16.41 49.66,16.41 IC1.3 | U$2.P$23 20.4,35.35 arc7 20.44,35.21 23.34,25.63 arc8 23.35,25.6 23.98,24.21 arc21 24,24.18 24.07,24.11 X1.3 | R26.4 10.05,5.41 10.05,5.51 arc41 10.03,5.58 9.24,6.5 arc12 9.14,6.59 8.33,7.2 arc37 8.27,7.22 8.17,7.22 Q7.2 7.36,7.65 7.25,7.65 arc-47 7.18,7.68 A3.4.PB2
  top-1 0.203: A2.4.PB2 34.94,16.03 arc-4 34.9,16.05 25.08,23.1 arc-9 25.07,23.11 24.99,23.18 X1.3
  bot-1 0.203: U$2.P$14 39.94,42.12 arc-28 39.37,41.98 36.83,41.97 21.59,41.97 arc-28 21.02,42.12 U$2.P$23
  BOTTOM 0.203: A2.4.PB2 48.53,10.27 arc-16 48.56,10.45 v50.22,16 | X1.3 23.8,23.16 23.73,23.09 20.82,20.18 arc-14 20.7,20.08 10.45,13.91 arc6 10.39,13.88 A3.4.PB2
SII-MISO  (via drill 0.4 pad 0.7)
  TOP 0.203: IC1.1 47.83,18.95 47.73,18.95 arc44 47.66,18.92 v47.26,18.54 | Q5.2 16.88,7.6 16.78,7.6 arc37 16.72,7.58 v16.21,7.2 10.64,4.62 arc-25 10.6,4.61 10.5,4.61 R26.3
  bot-1 0.203: U$2.P$22 23.56,44.24 arc-28 24.13,44.39 41.91,44.39 arc-28 42.48,44.24 U$2.P$13 | A3.5.PB1 v16.21,7.2
  BOTTOM 0.203: U$2.P$13 47.1,28.27 arc-9 47.12,28.08 v47.26,18.54 46.61,13.55 arc1 46.61,13.53 A2.5.PB1 43.95,6.72 arc-26 43.46,6.6 25.42,6.22 arc-1 25.4,6.22 22.86,6.22 arc-8 22.69,6.24 v16.21,7.2
VCC  (via drill 0.4 pad 0.7)
  TOP 0.203: SW4.O 4.8,42.64 4.8,42.54 arc15 4.81,42.51 v4.94,41.99 | R4.5 28.16,9.54 28.26,9.54 28.56,9.54 28.66,9.54 R4.6 28.96,9.54 29.06,9.54 29.36,9.54 29.46,9.54 R4.7 29.76,9.54 29.86,9.54 30.16,9.54 30.26,9.54 R4.8 30.56,9.31 30.66,9.31 arc-44 30.73,9.28 37.33,2.96 37.41,2.89 U1.5V
  top-1 0.203: v4.94,41.99 11.9,16.4 arc5 11.92,16.35 13.2,12.81 arc-10 13.22,12.69 13.65,10.16 arc22 13.74,9.92 15.65,6.85 arc34 15.94,6.6 23.32,3.33 arc-1 23.34,3.33 27.46,1.43 arc25 27.59,1.4 32.67,1.4 | 32.67,1.4 | 32.67,1.4 35.91,1.4 arc28 36.05,1.43 37.33,2.12 37.41,2.19 U1.5V
VCC_OFF  (via drill 0.4 pad 0.7)
  TOP 0.203: Q2.1 14.88,18.04 14.88,18.14 arc-9 14.88,18.16 v14.97,18.7
  top-1 0.203: v14.97,18.7 17.86,35.76 arc-9 17.91,35.94 20.2,42.8 20.44,43.55 arc-29 20.78,44.07 26.97,49.73 arc3 26.98,49.74 27.47,50.24 arc27 27.55,50.36 27.82,51.24 arc-27 27.9,51.36 28.39,51.85 arc-45 28.61,51.95 39.46,51.95 arc-28 39.61,51.91 40.89,51.22 40.96,51.15 U1.D8

## Text on the board
bDocu: ATTiny Fuse Reset with 12V / Charge Pump Programmer | TAMI.org.il / V001 05/2015
Name: |&lt; digital 13-8&gt;| | |&lt; digital 7-2 &gt;| | gnd | TX | RX | HV | ISP | |&lt;8 pin&gt;| | |&lt;--14 pin--&gt;| | 5V | 3.3V | TAMI ATtiny / HV / ISP / Programmer | test | load | |&lt;8 pin&gt;| | |&lt;--14 pin--&gt;| | PB0 | PB1 | PB2 | PB3 | ISP | PB4 | PB5 | ATTami | HV | H.B. | prog | ERR | ATTami | rst | 3v3 | 5V | -GND- | VIN | |&lt; analog 0-5 &gt;|